# EAGLE board pp_module_jack_rev_b_6_up (EAGLE 6.4)
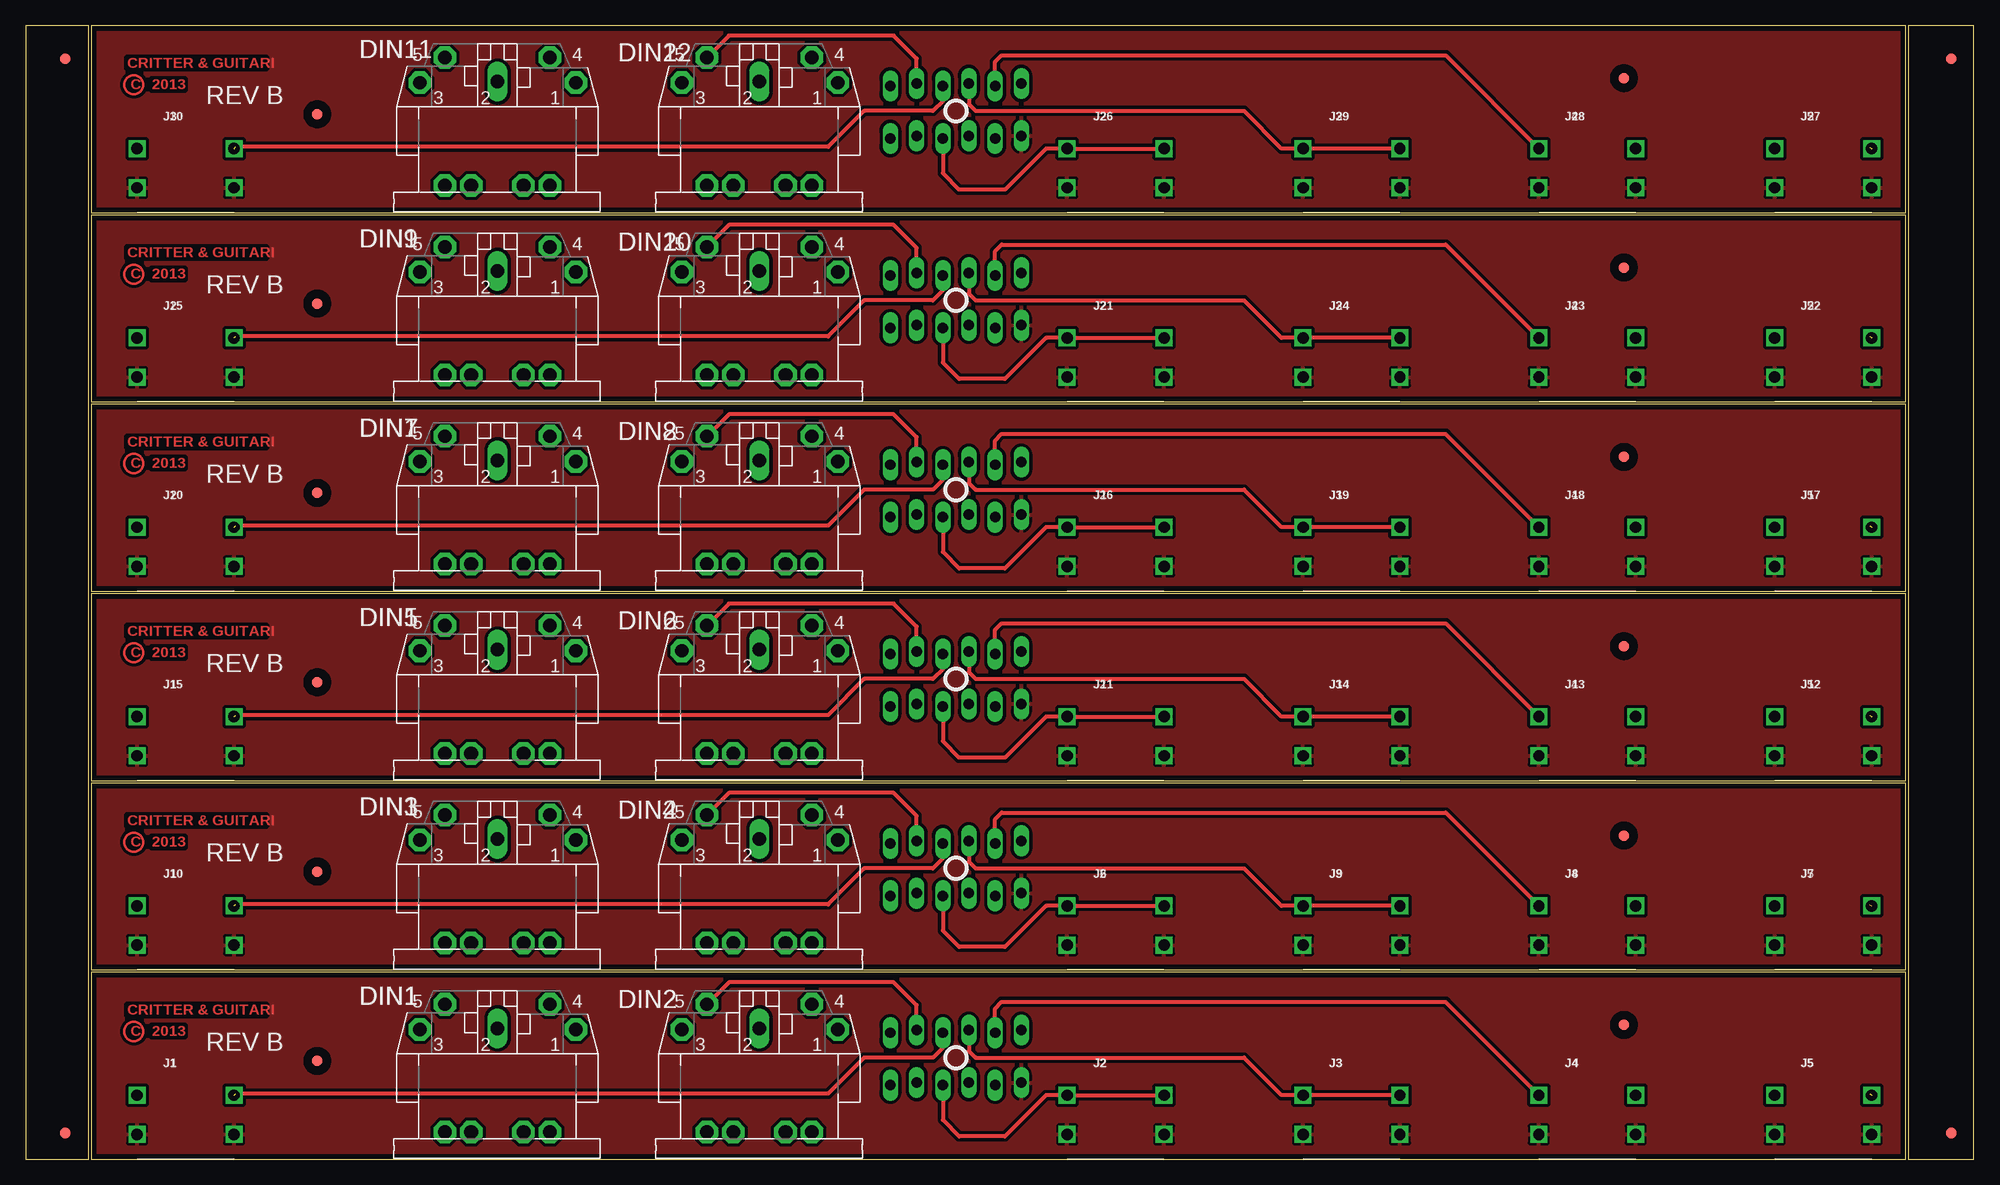
[diagram p0: board, top side]
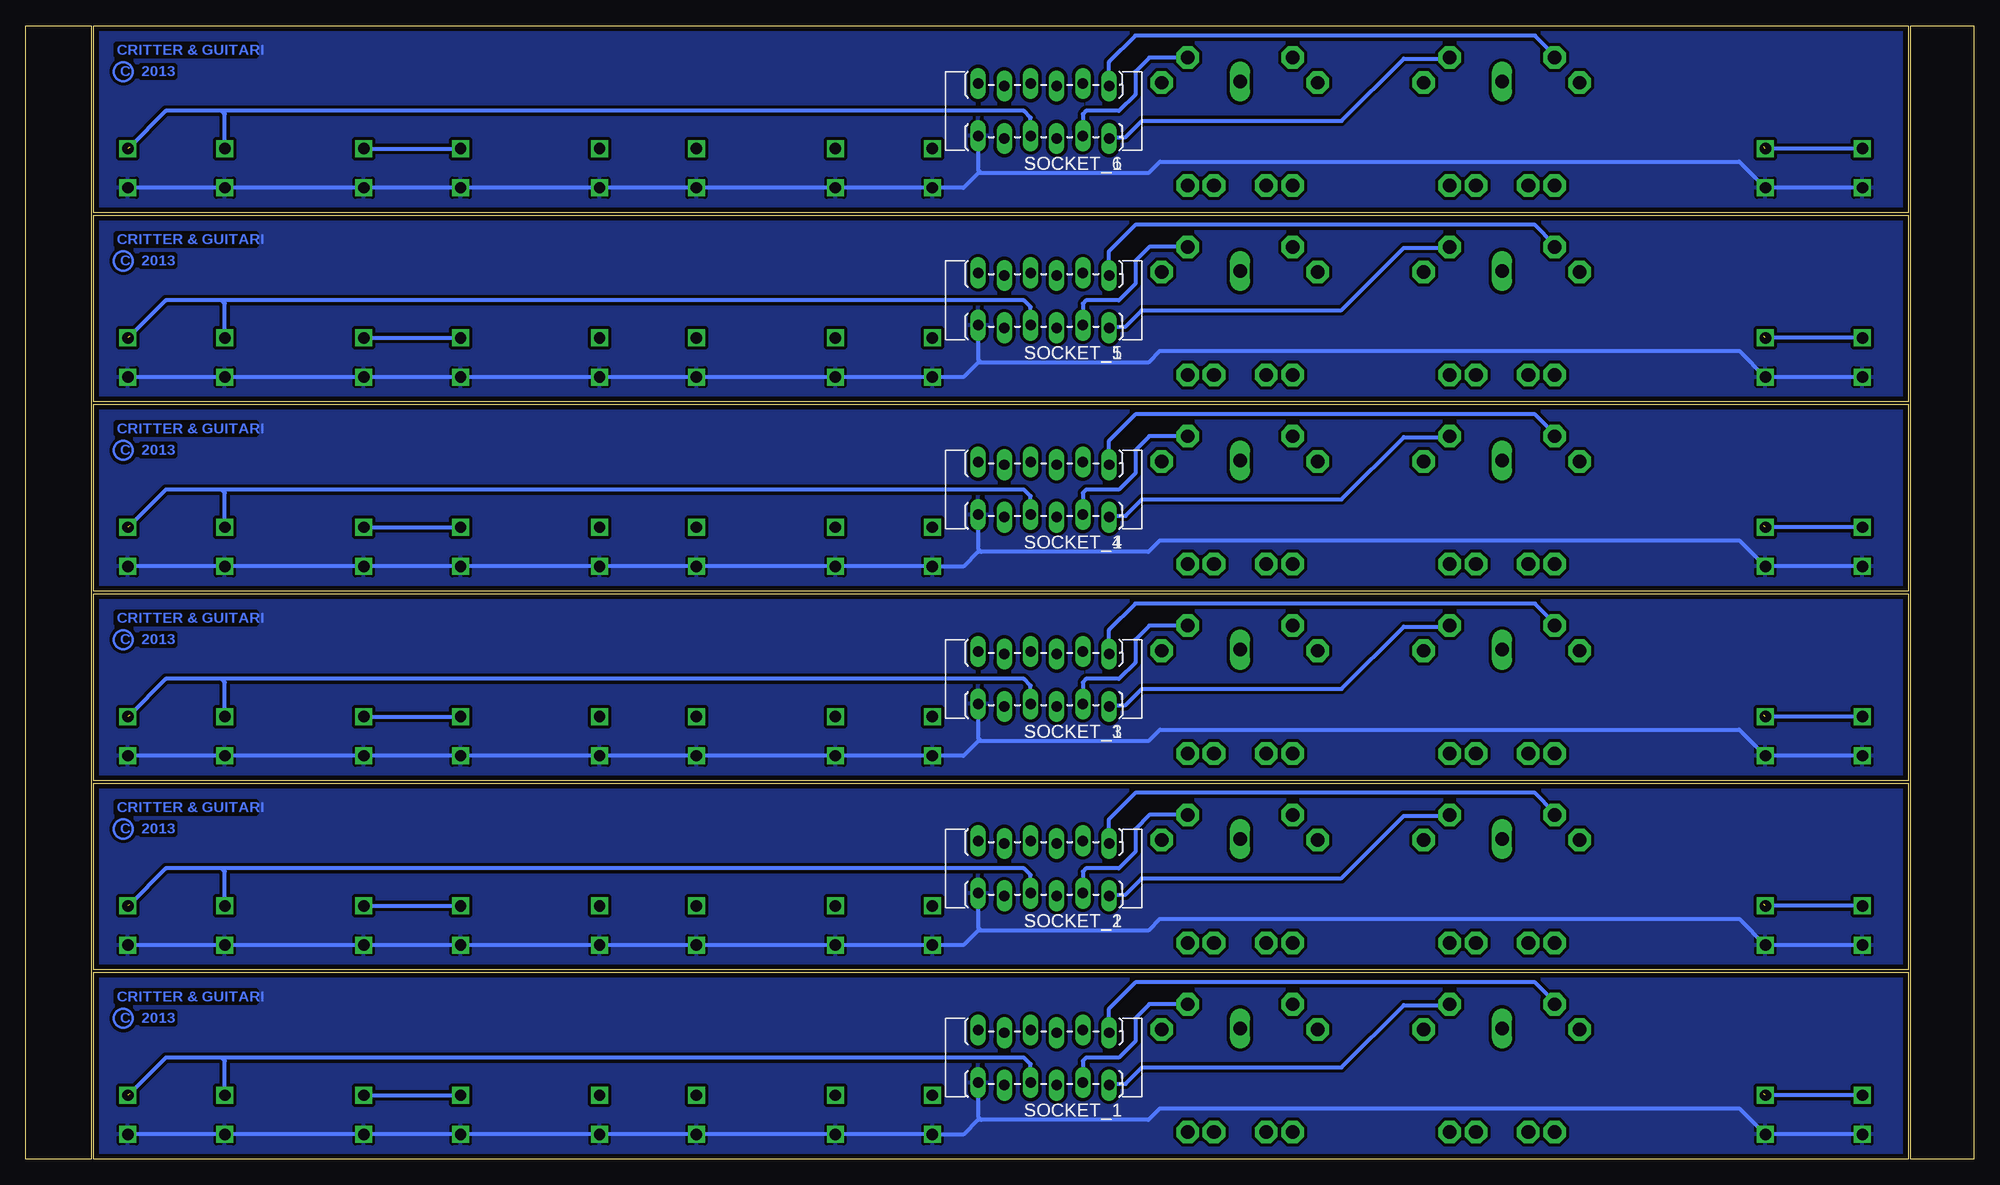
[diagram p1: board, bottom side, seen from below]

Size 188.85 x 109.86 mm. Coordinates in mm from the lower left corner, seen from the top.
Outline: 6.35,0 182.25,0 182.25,18.1 6.35,18.1 6.35,0
Outline: 6.35,18.35 182.25,18.35 182.25,36.45 6.35,36.45 6.35,18.35
Outline: 6.35,36.7 182.25,36.7 182.25,54.8 6.35,54.8 6.35,36.7
Outline: 6.35,55.05 182.25,55.05 182.25,73.15 6.35,73.15 6.35,55.05
Outline: 6.35,73.41 182.25,73.41 182.25,91.5 6.35,91.5 6.35,73.41
Outline: 6.35,91.76 182.25,91.76 182.25,109.86 6.35,109.86 6.35,91.76
Outline: 0,0 6.1,0 6.1,109.86 0,109.86 0,0
Outline: 182.5,0 188.85,0 188.85,109.86 182.5,109.86 182.5,0
Copper layers (1*16): Top 0.035mm / dielectric 1.5mm / Bottom 0.035mm
Design rules "default": minimum track width 10mil, minimum drill 24mil, track to track 10mil, track to pad 10mil, pad to pad 10mil, via to via 10mil, smd to smd 10mil, copper to edge 20mil, drill to drill 8mil, minimum pad ring 10mil, minimum via ring 8mil, stop-mask expansion 4mil, vias tented up to drill 0mil, thermal gap 10mil

## Footprints (pad centres in the part's own frame; a part is rotated, then mirrored left to right if it is on the bottom)
CP-2350 = drill 1.3 pad 2.184 octagon: 1 7.62,12.58; 3 -7.52,12.58; 4 5.08,15.02; 5 -5.08,15.02 | drill 1.3 long: 2 0,12.68 | drill 1.321 pad 2.184 octagon: PE -2.54,2.62; PE1 -5.08,2.62; PE2 5.08,2.62; PE@ 2.54,2.62
FIDUCIAL_1MM = smd 1 x 1: 1 0,0
CLIFF_JACK = drill 1.1 square: P$1 -4.445,-2.045; P$2 4.955,-2.045; P$3 -4.445,1.755; P$4 4.955,1.755
CARDEDGE_12POS_SOCKET = drill 1.016 long: 1 -6.35,-2.413; 2 -6.35,2.667; 3 -3.81,-2.667; 4 -3.81,2.413; 5 -1.27,-2.413; 6 -1.27,2.667; 7 1.27,-2.667; 8 1.27,2.413; 9 3.81,-2.413; 10 3.81,2.667; 11 6.35,-2.667; 12 6.35,2.413

## Placement (x,y rotation side)
DIN1  MIDIJACK  [CP-2350]  45.72,0 0 top
DIN2  MIDIJACK  [CP-2350]  71.12,0 0 top
DIN3  MIDIJACK  [CP-2350]  45.72,18.35 0 top
DIN4  MIDIJACK  [CP-2350]  71.12,18.35 0 top
DIN5  MIDIJACK  [CP-2350]  45.72,36.7 0 top
DIN6  MIDIJACK  [CP-2350]  71.12,36.7 0 top
DIN7  MIDIJACK  [CP-2350]  45.72,55.05 0 top
DIN8  MIDIJACK  [CP-2350]  71.12,55.05 0 top
DIN9  MIDIJACK  [CP-2350]  45.72,73.41 0 top
DIN10  MIDIJACK  [CP-2350]  71.12,73.41 0 top
DIN11  MIDIJACK  [CP-2350]  45.72,91.76 0 top
DIN12  MIDIJACK  [CP-2350]  71.12,91.76 0 top
E$1  [FIDUCIAL_1MM]  3.81,2.54 0 top
E$2  [FIDUCIAL_1MM]  186.69,106.68 0 top
E$3  [FIDUCIAL_1MM]  3.81,106.68 0 top
E$4  [FIDUCIAL_1MM]  186.69,2.54 0 top
J1  MONO_JACKCLIFF  [CLIFF_JACK]  15.24,4.45 0 top
J2  MONO_JACKCLIFF  [CLIFF_JACK]  105.41,4.45 0 top
J3  MONO_JACKCLIFF  [CLIFF_JACK]  128.27,4.45 0 top
J4  MONO_JACKCLIFF  [CLIFF_JACK]  151.13,4.45 0 top
J5  MONO_JACKCLIFF  [CLIFF_JACK]  173.99,4.45 0 top
J6  MONO_JACKCLIFF  [CLIFF_JACK]  105.41,22.8 0 top
J7  MONO_JACKCLIFF  [CLIFF_JACK]  173.99,22.8 0 top
J8  MONO_JACKCLIFF  [CLIFF_JACK]  151.13,22.8 0 top
J9  MONO_JACKCLIFF  [CLIFF_JACK]  128.27,22.8 0 top
J10  MONO_JACKCLIFF  [CLIFF_JACK]  15.24,22.8 0 top
J11  MONO_JACKCLIFF  [CLIFF_JACK]  105.41,41.15 0 top
J12  MONO_JACKCLIFF  [CLIFF_JACK]  173.99,41.15 0 top
J13  MONO_JACKCLIFF  [CLIFF_JACK]  151.13,41.15 0 top
J14  MONO_JACKCLIFF  [CLIFF_JACK]  128.27,41.15 0 top
J15  MONO_JACKCLIFF  [CLIFF_JACK]  15.24,41.15 0 top
J16  MONO_JACKCLIFF  [CLIFF_JACK]  105.41,59.5 0 top
J17  MONO_JACKCLIFF  [CLIFF_JACK]  173.99,59.5 0 top
J18  MONO_JACKCLIFF  [CLIFF_JACK]  151.13,59.5 0 top
J19  MONO_JACKCLIFF  [CLIFF_JACK]  128.27,59.5 0 top
J20  MONO_JACKCLIFF  [CLIFF_JACK]  15.24,59.5 0 top
J21  MONO_JACKCLIFF  [CLIFF_JACK]  105.41,77.85 0 top
J22  MONO_JACKCLIFF  [CLIFF_JACK]  173.99,77.85 0 top
J23  MONO_JACKCLIFF  [CLIFF_JACK]  151.13,77.85 0 top
J24  MONO_JACKCLIFF  [CLIFF_JACK]  128.27,77.85 0 top
J25  MONO_JACKCLIFF  [CLIFF_JACK]  15.24,77.85 0 top
J26  MONO_JACKCLIFF  [CLIFF_JACK]  105.41,96.2 0 top
J27  MONO_JACKCLIFF  [CLIFF_JACK]  173.99,96.2 0 top
J28  MONO_JACKCLIFF  [CLIFF_JACK]  151.13,96.2 0 top
J29  MONO_JACKCLIFF  [CLIFF_JACK]  128.27,96.2 0 top
J30  MONO_JACKCLIFF  [CLIFF_JACK]  15.24,96.2 0 top
SOCKET_1  CARDEDGE_12POS_SOCKET  [CARDEDGE_12POS_SOCKET]  90.17,9.84 180 bottom
SOCKET_2  CARDEDGE_12POS_SOCKET  [CARDEDGE_12POS_SOCKET]  90.17,28.19 180 bottom
SOCKET_3  CARDEDGE_12POS_SOCKET  [CARDEDGE_12POS_SOCKET]  90.17,46.55 180 bottom
SOCKET_4  CARDEDGE_12POS_SOCKET  [CARDEDGE_12POS_SOCKET]  90.17,64.9 180 bottom
SOCKET_5  CARDEDGE_12POS_SOCKET  [CARDEDGE_12POS_SOCKET]  90.17,83.25 180 bottom
SOCKET_6  CARDEDGE_12POS_SOCKET  [CARDEDGE_12POS_SOCKET]  90.17,101.6 180 bottom
U$1  FIDUCIAL  [FIDUCIAL_1MM]  28.26,9.53 0 top
U$2  FIDUCIAL  [FIDUCIAL_1MM]  154.94,13.02 0 top
U$3  LOGOCG  [LOGO-CG]  21.91,32.32 0 top
U$4  LOGOCG  [LOGO-CG]  167.96,33.59 0 bottom
U$5  FIDUCIAL  [FIDUCIAL_1MM]  28.26,27.88 0 top
U$6  FIDUCIAL  [FIDUCIAL_1MM]  154.94,31.37 0 top
U$7  LOGOCG  [LOGO-CG]  21.91,50.67 0 top
U$8  LOGOCG  [LOGO-CG]  167.96,51.94 0 bottom
U$9  LOGOCG  [LOGO-CG]  21.91,13.97 0 top
U$10  LOGOCG  [LOGO-CG]  167.96,15.24 0 bottom
U$11  FIDUCIAL  [FIDUCIAL_1MM]  28.26,46.23 0 top
U$12  FIDUCIAL  [FIDUCIAL_1MM]  154.94,49.72 0 top
U$13  LOGOCG  [LOGO-CG]  21.91,69.02 0 top
U$14  LOGOCG  [LOGO-CG]  167.96,70.29 0 bottom
U$15  FIDUCIAL  [FIDUCIAL_1MM]  28.26,64.58 0 top
U$16  FIDUCIAL  [FIDUCIAL_1MM]  154.94,68.07 0 top
U$17  LOGOCG  [LOGO-CG]  21.91,87.38 0 top
U$18  LOGOCG  [LOGO-CG]  167.96,88.65 0 bottom
U$19  FIDUCIAL  [FIDUCIAL_1MM]  28.26,82.93 0 top
U$20  FIDUCIAL  [FIDUCIAL_1MM]  154.94,86.42 0 top
U$21  LOGOCG  [LOGO-CG]  21.91,105.73 0 top
U$22  LOGOCG  [LOGO-CG]  167.96,107 0 bottom
U$23  FIDUCIAL  [FIDUCIAL_1MM]  28.26,101.28 0 top
U$24  FIDUCIAL  [FIDUCIAL_1MM]  154.94,104.78 0 top

## Library data of the parts
DIN1-DIN12 E$1-E$4 J1-J30 SOCKET_1-SOCKET_6 U$1-U$24 = osborn

## Nets
1V/OCT: J4.P$3 J4.P$4 SOCKET_1.9
1V/OCT1: J8.P$3 J8.P$4 SOCKET_2.9
1V/OCT2: J13.P$3 J13.P$4 SOCKET_3.9
1V/OCT3: J18.P$3 J18.P$4 SOCKET_4.9
1V/OCT4: J23.P$3 J23.P$4 SOCKET_5.9
1V/OCT5: J28.P$3 J28.P$4 SOCKET_6.9
+5V: SOCKET_1.11
+5V1: SOCKET_2.11
+5V2: SOCKET_3.11
+5V3: SOCKET_4.11
+5V4: SOCKET_5.11
+5V5: SOCKET_6.11
+12V: SOCKET_1.10
+12V1: SOCKET_2.10
+12V2: SOCKET_3.10
+12V3: SOCKET_4.10
+12V4: SOCKET_5.10
+12V5: SOCKET_6.10
CLKIN: J1.P$3 J1.P$4 SOCKET_1.5
CLKIN1: J10.P$3 J10.P$4 SOCKET_2.5
CLKIN2: J15.P$3 J15.P$4 SOCKET_3.5
CLKIN3: J20.P$3 J20.P$4 SOCKET_4.5
CLKIN4: J25.P$3 J25.P$4 SOCKET_5.5
CLKIN5: J30.P$3 J30.P$4 SOCKET_6.5
GATE: J3.P$3 J3.P$4 SOCKET_1.7
GATE1: J9.P$3 J9.P$4 SOCKET_2.7
GATE2: J14.P$3 J14.P$4 SOCKET_3.7
GATE3: J19.P$3 J19.P$4 SOCKET_4.7
GATE4: J24.P$3 J24.P$4 SOCKET_5.7
GATE5: J29.P$3 J29.P$4 SOCKET_6.7
GND: J1.P$1 J1.P$2 J2.P$1 J2.P$2 J3.P$1 J3.P$2 J4.P$1 J4.P$2 J5.P$1 J5.P$2 SOCKET_1.12
GND1: J6.P$1 J6.P$2 J7.P$1 J7.P$2 J8.P$1 J8.P$2 J9.P$1 J9.P$2 J10.P$1 J10.P$2 SOCKET_2.12
GND2: J11.P$1 J11.P$2 J12.P$1 J12.P$2 J13.P$1 J13.P$2 J14.P$1 J14.P$2 J15.P$1 J15.P$2 SOCKET_3.12
GND3: J16.P$1 J16.P$2 J17.P$1 J17.P$2 J18.P$1 J18.P$2 J19.P$1 J19.P$2 J20.P$1 J20.P$2 SOCKET_4.12
GND4: J21.P$1 J21.P$2 J22.P$1 J22.P$2 J23.P$1 J23.P$2 J24.P$1 J24.P$2 J25.P$1 J25.P$2 SOCKET_5.12
GND5: J26.P$1 J26.P$2 J27.P$1 J27.P$2 J28.P$1 J28.P$2 J29.P$1 J29.P$2 J30.P$1 J30.P$2 SOCKET_6.12
MIDIIN_1: DIN3.4 SOCKET_2.2
MIDIIN_2: DIN3.5 SOCKET_2.1
MIDIIN_3: DIN5.4 SOCKET_3.2
MIDIIN_4: DIN1.4 SOCKET_1.2
MIDIIN_5: DIN1.5 SOCKET_1.1
MIDIIN_6: DIN5.5 SOCKET_3.1
MIDIIN_7: DIN7.4 SOCKET_4.2
MIDIIN_8: DIN7.5 SOCKET_4.1
MIDIIN_9: DIN9.4 SOCKET_5.2
MIDIIN_10: DIN9.5 SOCKET_5.1
MIDIIN_11: DIN11.4 SOCKET_6.2
MIDIIN_12: DIN11.5 SOCKET_6.1
MIDIOUT_1: DIN4.5 SOCKET_2.3
MIDIOUT_2: DIN4.4 SOCKET_2.4
MIDIOUT_3: DIN6.5 SOCKET_3.3
MIDIOUT_4: DIN2.4 SOCKET_1.4
MIDIOUT_5: DIN2.5 SOCKET_1.3
MIDIOUT_6: DIN6.4 SOCKET_3.4
MIDIOUT_7: DIN8.5 SOCKET_4.3
MIDIOUT_8: DIN8.4 SOCKET_4.4
MIDIOUT_9: DIN10.5 SOCKET_5.3
MIDIOUT_10: DIN10.4 SOCKET_5.4
MIDIOUT_11: DIN12.5 SOCKET_6.3
MIDIOUT_12: DIN12.4 SOCKET_6.4
PWM: J5.P$3 J5.P$4 SOCKET_1.8
PWM1: J7.P$3 J7.P$4 SOCKET_2.8
PWM2: J12.P$3 J12.P$4 SOCKET_3.8
PWM3: J17.P$3 J17.P$4 SOCKET_4.8
PWM4: J22.P$3 J22.P$4 SOCKET_5.8
PWM5: J27.P$3 J27.P$4 SOCKET_6.8
TRIG: J2.P$3 J2.P$4 SOCKET_1.6
TRIG1: J6.P$3 J6.P$4 SOCKET_2.6
TRIG2: J11.P$3 J11.P$4 SOCKET_3.6
TRIG3: J16.P$3 J16.P$4 SOCKET_4.6
TRIG4: J21.P$3 J21.P$4 SOCKET_5.6
TRIG5: J26.P$3 J26.P$4 SOCKET_6.6

## Tracks (layer width: path | path; a pad name or v marks a point on that pad's centre or on a via)
1V/OCT
  Top 0.406: SOCKET_1.9 93.98,14.61 94.61,15.24 137.66,15.24 137.66,15.23 J4.P$3
  Bottom 0.406: J4.P$4 J4.P$3
1V/OCT1
  Top 0.406: SOCKET_2.9 93.98,32.96 94.61,33.59 137.66,33.59 137.66,33.58 J8.P$3
  Bottom 0.406: J8.P$4 J8.P$3
1V/OCT2
  Top 0.406: SOCKET_3.9 93.98,51.31 94.61,51.94 137.66,51.94 137.66,51.93 J13.P$3
  Bottom 0.406: J13.P$4 J13.P$3
1V/OCT3
  Top 0.406: SOCKET_4.9 93.98,69.66 94.61,70.29 137.66,70.29 137.66,70.28 J18.P$3
  Bottom 0.406: J18.P$4 J18.P$3
1V/OCT4
  Top 0.406: SOCKET_5.9 93.98,88.01 94.61,88.65 137.66,88.65 137.66,88.64 J23.P$3
  Bottom 0.406: J23.P$4 J23.P$3
1V/OCT5
  Top 0.406: SOCKET_6.9 93.98,106.36 94.61,107 137.66,107 137.66,106.99 J28.P$3
  Bottom 0.406: J28.P$4 J28.P$3
CLKIN  (1 unrouted)
  Top 0.406: SOCKET_1.5 88.9,10.79 87.95,9.84 81.28,9.84 77.79,6.35 20.34,6.35
  Bottom 0.406: J1.P$3 J1.P$4
CLKIN1  (1 unrouted)
  Top 0.406: SOCKET_2.5 88.9,29.15 87.95,28.19 81.28,28.19 77.79,24.7 20.34,24.7
  Bottom 0.406: J10.P$3 J10.P$4
CLKIN2  (1 unrouted)
  Top 0.406: SOCKET_3.5 88.9,47.5 87.95,46.55 81.28,46.55 77.79,43.05 20.34,43.05
  Bottom 0.406: J15.P$3 J15.P$4
CLKIN3  (1 unrouted)
  Top 0.406: SOCKET_4.5 88.9,65.85 87.95,64.9 81.28,64.9 77.79,61.4 20.34,61.4
  Bottom 0.406: J20.P$3 J20.P$4
CLKIN4  (1 unrouted)
  Top 0.406: SOCKET_5.5 88.9,84.2 87.95,83.25 81.28,83.25 77.79,79.76 20.34,79.76
  Bottom 0.406: J25.P$3 J25.P$4
CLKIN5  (1 unrouted)
  Top 0.406: SOCKET_6.5 88.9,102.55 87.95,101.6 81.28,101.6 77.79,98.11 20.34,98.11
  Bottom 0.406: J30.P$3 J30.P$4
GATE
  Top 0.406: SOCKET_1.7 91.44,10.48 92.07,9.84 118.11,9.84 121.75,6.2 J3.P$3 J3.P$4
GATE1
  Top 0.406: SOCKET_2.7 91.44,28.83 92.07,28.19 118.11,28.19 121.75,24.55 J9.P$3 J9.P$4
GATE2
  Top 0.406: SOCKET_3.7 91.44,47.18 92.07,46.55 118.11,46.55 121.75,42.9 J14.P$3 J14.P$4
GATE3
  Top 0.406: SOCKET_4.7 91.44,65.53 92.07,64.9 118.11,64.9 121.75,61.26 J19.P$3 J19.P$4
GATE4
  Top 0.406: SOCKET_5.7 91.44,83.88 92.07,83.25 118.11,83.25 121.75,79.61 J24.P$3 J24.P$4
GATE5
  Top 0.406: SOCKET_6.7 91.44,102.23 92.07,101.6 118.11,101.6 121.75,97.96 J29.P$3 J29.P$4
GND
  Bottom 0.406: 96.2,3.81 80.01,3.81 78.89,4.93 22.73,4.93 J1.P$2 J1.P$1 | 96.2,3.81 96.52,3.81 97.94,2.39 100.95,2.39 J2.P$1 J2.P$2 J3.P$1 J3.P$2 J4.P$1 J4.P$2 169.37,2.4 169.86,1.91 169.86,2.08 J5.P$1 J5.P$2 | SOCKET_1.12 96.52,4.13 96.2,3.81
  pour Top (isolate 0.305): 6.67,17.78 181.93,17.78 181.93,0.32 6.67,0.32
  pour Bottom (isolate 0.305): 6.67,17.78 181.93,17.78 181.93,0.32 6.67,0.32
GND1
  Bottom 0.406: 96.2,22.16 80.01,22.16 78.89,23.28 22.73,23.28 J10.P$2 J10.P$1 | 96.2,22.16 96.52,22.16 97.94,20.74 100.95,20.74 J6.P$1 J6.P$2 J9.P$1 J9.P$2 J8.P$1 J8.P$2 169.37,20.75 169.86,20.26 169.86,20.43 J7.P$1 J7.P$2 | SOCKET_2.12 96.52,22.48 96.2,22.16
  pour Top (isolate 0.305): 6.67,36.13 181.93,36.13 181.93,18.67 6.67,18.67
  pour Bottom (isolate 0.305): 6.67,36.13 181.93,36.13 181.93,18.67 6.67,18.67
GND2
  Bottom 0.406: 96.2,40.51 80.01,40.51 78.89,41.63 22.73,41.63 J15.P$2 J15.P$1 | 96.2,40.51 96.52,40.51 97.94,39.09 100.95,39.09 J11.P$1 J11.P$2 J14.P$1 J14.P$2 J13.P$1 J13.P$2 169.37,39.1 169.86,38.61 169.86,38.78 J12.P$1 J12.P$2 | SOCKET_3.12 96.52,40.83 96.2,40.51
  pour Top (isolate 0.305): 6.67,54.48 181.93,54.48 181.93,37.02 6.67,37.02
  pour Bottom (isolate 0.305): 6.67,54.48 181.93,54.48 181.93,37.02 6.67,37.02
GND3
  Bottom 0.406: 96.2,58.86 80.01,58.86 78.89,59.98 22.73,59.98 J20.P$2 J20.P$1 | 96.2,58.86 96.52,58.86 97.94,57.44 100.95,57.44 J16.P$1 J16.P$2 J19.P$1 J19.P$2 J18.P$1 J18.P$2 169.37,57.45 169.86,56.96 169.86,57.14 J17.P$1 J17.P$2 | SOCKET_4.12 96.52,59.18 96.2,58.86
  pour Top (isolate 0.305): 6.67,72.83 181.93,72.83 181.93,55.37 6.67,55.37
  pour Bottom (isolate 0.305): 6.67,72.83 181.93,72.83 181.93,55.37 6.67,55.37
GND4
  Bottom 0.406: 96.2,77.22 80.01,77.22 78.89,78.34 22.73,78.34 J25.P$2 J25.P$1 | 96.2,77.22 96.52,77.22 97.94,75.8 100.95,75.8 J21.P$1 J21.P$2 J24.P$1 J24.P$2 J23.P$1 J23.P$2 169.37,75.81 169.86,75.31 169.86,75.49 J22.P$1 J22.P$2 | SOCKET_5.12 96.52,77.53 96.2,77.22
  pour Top (isolate 0.305): 6.67,91.19 181.93,91.19 181.93,73.72 6.67,73.72
  pour Bottom (isolate 0.305): 6.67,91.19 181.93,91.19 181.93,73.72 6.67,73.72
GND5
  Bottom 0.406: 96.2,95.57 80.01,95.57 78.89,96.69 22.73,96.69 J30.P$2 J30.P$1 | 96.2,95.57 96.52,95.57 97.94,94.15 100.95,94.15 J26.P$1 J26.P$2 J29.P$1 J29.P$2 J28.P$1 J28.P$2 169.37,94.16 169.86,93.66 169.86,93.84 J27.P$1 J27.P$2 | SOCKET_6.12 96.52,95.89 96.2,95.57
  pour Top (isolate 0.305): 6.67,109.54 181.93,109.54 181.93,92.08 6.67,92.08
  pour Bottom (isolate 0.305): 6.67,109.54 181.93,109.54 181.93,92.08 6.67,92.08
MIDIIN_1
  Bottom 0.406: SOCKET_2.2 83.69,25.65 82.23,25.65 80.64,27.24 61.28,27.24 55.25,33.27 50.9,33.27 DIN3.4
MIDIIN_2
  Bottom 0.406: SOCKET_2.1 83.82,32.96 81.28,35.5 42.55,35.5 40.64,33.59 DIN3.5
MIDIIN_3
  Bottom 0.406: SOCKET_3.2 83.69,44.01 82.23,44.01 80.64,45.59 61.28,45.59 55.25,51.63 50.9,51.63 DIN5.4
MIDIIN_4
  Bottom 0.406: SOCKET_1.2 83.69,7.3 82.23,7.3 80.64,8.89 61.28,8.89 55.25,14.92 50.9,14.92 DIN1.4
MIDIIN_5
  Bottom 0.406: SOCKET_1.1 83.82,14.61 81.28,17.14 42.55,17.14 40.64,15.24 DIN1.5
MIDIIN_6
  Bottom 0.406: SOCKET_3.1 83.82,51.31 81.28,53.85 42.55,53.85 40.64,51.94 DIN5.5
MIDIIN_7
  Bottom 0.406: SOCKET_4.2 83.69,62.36 82.23,62.36 80.64,63.94 61.28,63.94 55.25,69.98 50.9,69.98 DIN7.4
MIDIIN_8
  Bottom 0.406: SOCKET_4.1 83.82,69.66 81.28,72.2 42.55,72.2 40.64,70.29 DIN7.5
MIDIIN_9
  Bottom 0.406: SOCKET_5.2 83.69,80.71 82.23,80.71 80.64,82.3 61.28,82.3 55.25,88.33 50.9,88.33 DIN9.4
MIDIIN_10
  Bottom 0.406: SOCKET_5.1 83.82,88.01 81.28,90.55 42.55,90.55 40.64,88.65 DIN9.5
MIDIIN_11
  Bottom 0.406: SOCKET_6.2 83.69,99.06 82.23,99.06 80.64,100.65 61.28,100.65 55.25,106.68 50.9,106.68 DIN11.4
MIDIIN_12
  Bottom 0.406: SOCKET_6.1 83.82,106.36 81.28,108.9 42.55,108.9 40.64,107 DIN11.5
MIDIOUT_1
  Top 0.406: SOCKET_2.3 86.36,33.27 84.14,35.5 68.16,35.5 DIN4.5
MIDIOUT_2
  Bottom 0.406: DIN4.4 79.91,33.37 81.28,32 81.28,29.78 82.87,28.19 86.04,28.19 86.36,27.88 SOCKET_2.4
MIDIOUT_3
  Top 0.406: SOCKET_3.3 86.36,51.63 84.14,53.85 68.16,53.85 DIN6.5
MIDIOUT_4
  Bottom 0.406: DIN2.4 79.91,15.02 81.28,13.65 81.28,11.43 82.87,9.84 86.04,9.84 86.36,9.53 SOCKET_1.4
MIDIOUT_5
  Top 0.406: SOCKET_1.3 86.36,14.92 84.14,17.14 68.16,17.14 DIN2.5
MIDIOUT_6
  Bottom 0.406: DIN6.4 79.91,51.72 81.28,50.35 81.28,48.13 82.87,46.55 86.04,46.55 86.36,46.23 SOCKET_3.4
MIDIOUT_7
  Top 0.406: SOCKET_4.3 86.36,69.98 84.14,72.2 68.16,72.2 DIN8.5
MIDIOUT_8
  Bottom 0.406: DIN8.4 79.91,70.08 81.28,68.71 81.28,66.48 82.87,64.9 86.04,64.9 86.36,64.58 SOCKET_4.4
MIDIOUT_9
  Top 0.406: SOCKET_5.3 86.36,88.33 84.14,90.55 68.16,90.55 DIN10.5
MIDIOUT_10
  Bottom 0.406: DIN10.4 79.91,88.43 81.28,87.06 81.28,84.84 82.87,83.25 86.04,83.25 86.36,82.93 SOCKET_5.4
MIDIOUT_11
  Top 0.406: SOCKET_6.3 86.36,106.68 84.14,108.9 68.16,108.9 DIN12.5
MIDIOUT_12
  Bottom 0.406: DIN12.4 79.91,106.78 81.28,105.41 81.28,103.19 82.87,101.6 86.04,101.6 86.36,101.28 SOCKET_6.4
PWM  (1 unrouted)
  Bottom 0.406: SOCKET_1.8 91.44,9.21 92.07,9.84 169.86,9.84 | 169.86,9.84 175.26,9.84 178.75,6.33 | J5.P$3 169.54,9.53 169.86,9.84
PWM1  (1 unrouted)
  Bottom 0.406: SOCKET_2.8 91.44,27.56 92.07,28.19 169.86,28.19 | 169.86,28.19 175.26,28.19 178.75,24.69 | J7.P$3 169.54,27.88 169.86,28.19
PWM2  (1 unrouted)
  Bottom 0.406: SOCKET_3.8 91.44,45.91 92.07,46.55 169.86,46.55 | 169.86,46.55 175.26,46.55 178.75,43.04 | J12.P$3 169.54,46.23 169.86,46.55
PWM3  (1 unrouted)
  Bottom 0.406: SOCKET_4.8 91.44,64.26 92.07,64.9 169.86,64.9 | 169.86,64.9 175.26,64.9 178.75,61.39 | J17.P$3 169.54,64.58 169.86,64.9
PWM4  (1 unrouted)
  Bottom 0.406: SOCKET_5.8 91.44,82.61 92.07,83.25 169.86,83.25 | 169.86,83.25 175.26,83.25 178.75,79.74 | J22.P$3 169.54,82.93 169.86,83.25
PWM5  (1 unrouted)
  Bottom 0.406: SOCKET_6.8 91.44,100.97 92.07,101.6 169.86,101.6 | 169.86,101.6 175.26,101.6 178.75,98.09 | J27.P$3 169.54,101.28 169.86,101.6
TRIG
  Top 0.406: SOCKET_1.6 88.9,3.81 90.49,2.22 94.93,2.22 98.91,6.2 J2.P$3 J2.P$4
TRIG1
  Top 0.406: SOCKET_2.6 88.9,22.16 90.49,20.57 94.93,20.57 98.91,24.55 J6.P$3 J6.P$4
TRIG2
  Top 0.406: SOCKET_3.6 88.9,40.51 90.49,38.92 94.93,38.92 98.91,42.9 J11.P$3 J11.P$4
TRIG3
  Top 0.406: SOCKET_4.6 88.9,58.86 90.49,57.28 94.93,57.28 98.91,61.26 J16.P$3 J16.P$4
TRIG4
  Top 0.406: SOCKET_5.6 88.9,77.22 90.49,75.63 94.93,75.63 98.91,79.61 J21.P$3 J21.P$4
TRIG5
  Top 0.406: SOCKET_6.6 88.9,95.57 90.49,93.98 94.93,93.98 98.91,97.96 J26.P$3 J26.P$4

## Text on the board
tPlace: REV B | REV B | REV B | REV B | REV B | REV B
_tNames: DIN1 | DIN2 | J1 | J2 | J3 | J4 | J5 | DIN1 | DIN2 | J1 | J2 | J3 | J4 | J5 | DIN1 | DIN2 | J1 | J2 | J3 | J4 | J5 | DIN1 | DIN2 | J1 | J2 | J3 | J4 | J5 | DIN1 | DIN2 | J1 | J2 | J3 | J4 | J5 | DIN1 | DIN2 | J1 | J2 | J3 | J4 | J5
_bNames: SOCKET_1 | SOCKET_1 | SOCKET_1 | SOCKET_1 | SOCKET_1 | SOCKET_1